# Altium PCB Receptor_AIS_R00.PcbDoc (part 2 of 2)
Units mm, origin at the board's own origin, x right, y up, seen from the top; angles counter-clockwise.
Board outline 80 x 80 mm, 4 copper layers (Top Layer, Layer 1, Layer 2, Bottom Layer), stack 1.587 mm thick; 130 components, 68 nets, 396 pads, 647 vias.
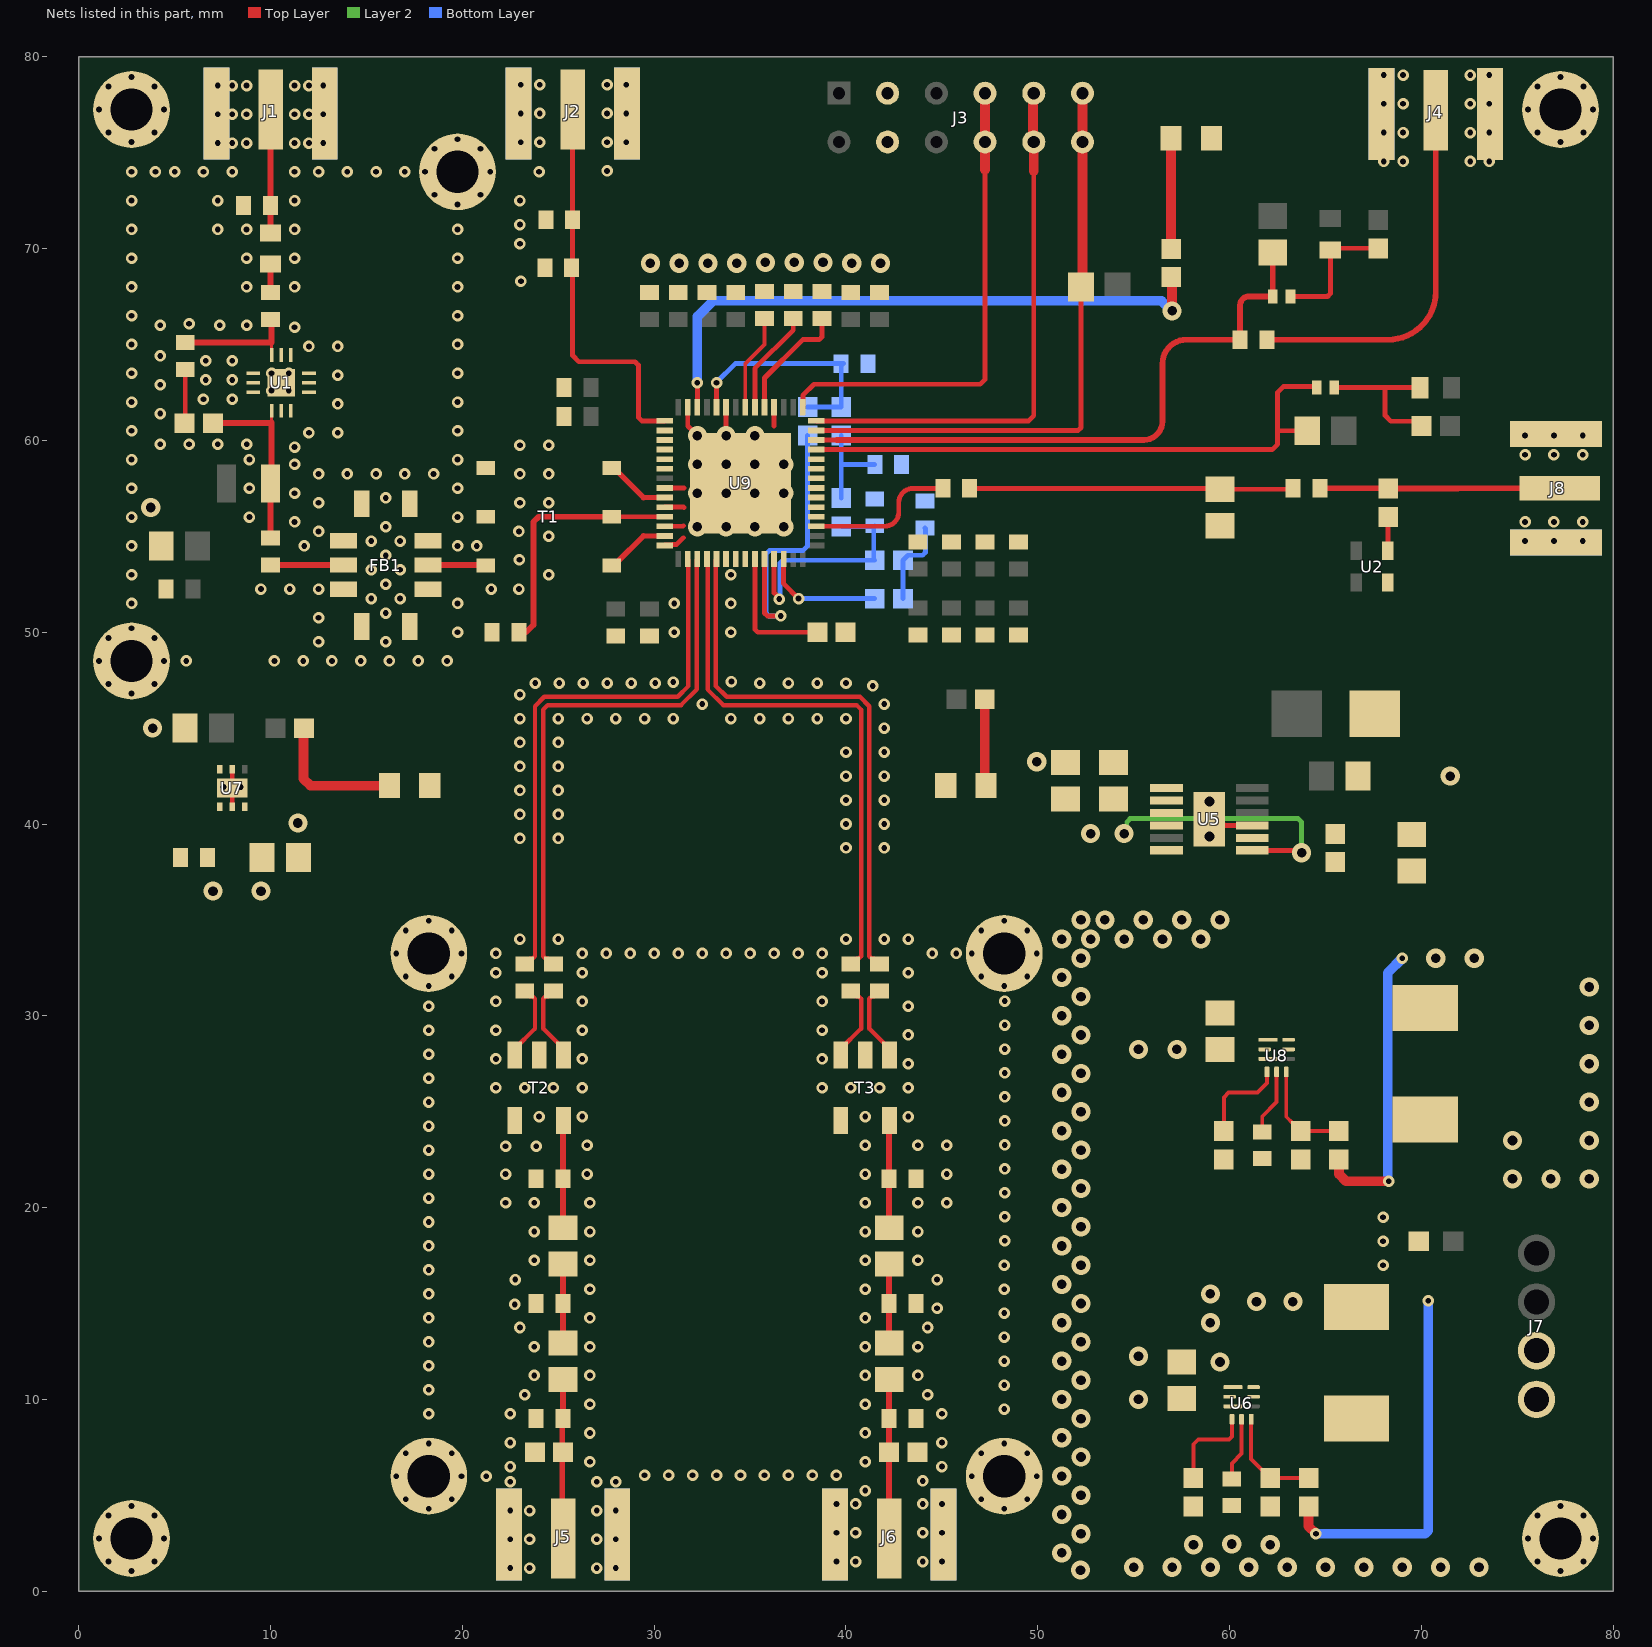
[diagram p4: the nets of this part, all layers, seen from the top]

## Via types
v1: diameter 0.6, hole 0.3, Top Layer to Bottom Layer, tented both sides, 472 vias
v2: diameter 1, hole 0.5, Top Layer to Bottom Layer, tented both sides, 127 vias
v3: diameter 0.6, hole 0.3, Top Layer to Bottom Layer, 48 vias

## Nets (pads, with @x,y where several pads share a name; then routed paths per layer and width w, separated by ;. In a path a pad name is that pad's centre, name@x,y a point inside that pad or via, vN(x,y) a via of type N, cw(c..) or ccw(c..) an arc to the next point about the centre after c; other vN are vias at no path point) (continued)
CS: J3.11 J3.12 R10.1 U9.27 | length 31.3
  Top Layer w0.254: U9.27@38.45,60.52 52.101,60.52 52.25,60.669 R10.1@52.25,68
  Top Layer w0.508: R10.1@52.25,68 52.33,68.08 52.33,75.17 J3.12@52.33,75.56 J3.11@52.33,78.1
GND: C1.1 C2.2 C6.1 C7.1 C8.2 C9.2 C10.2 C11.2 C14.2 C15.1 C16.2 C17.2 C19.2 C20.2 C22.1 C24.2 C25.2 C26.2 C27.2 C28.2 C29.2 C30.2 C31.2 C32.2 C33.2 C34.2 C35.2 C36.2 C37.2 C38.2 C39.2 C40.2 C44.2 C45.2 C46.1 C47.1 C48.1 C49.1 C50.1 C51.1 C52.1 C53.1 C54.1 C55.1 C56.1 C57.1 C58.1 C59.1 C60.1 D1.2 D2.2 D3.2 Designator13.1 Designator14.1 Designator15.1 Designator16.1 Designator17.1 Designator18.1 FB1.1 FB1.3 FB1.4 FB1.5 FB1.6 FB1.8 FB1.9 FB1.10 H1.1 H2.1 H3.1 H4.1 J1.2 J1.3 J2.2 J2.3 J3.3 J3.4 J4.2 J4.3 J5.2 J5.3 J6.2 J6.3 J7.1 J7.2 J8.2 J8.3 R6.2 R18.2 R19.1 R20.1 R22.1 R23.1 R24.1 R26.1 R27.1 T1.1 T1.2 T2.2 T2.5 T3.2 T3.5 U1.1 U1.2 U1.4 U1.5 U1.6 U1.8 U1.9 U1.10 U1.11 U1.12 U1.13 U2.2 U5.6 U5.9 U5.EPAD U6.4 U7.2 U7.3 U7.5 U7.7 U8.4 U9.6 U9.7 U9.8 U9.18 U9.19 U9.20 U9.21 U9.22 U9.23 U9.24 U9.32 U9.37 U9.41 U9.44 U9.45 U9.46 U9.47 U9.48 U9.50 U9.52 U9.54 U9.56 U9.57 | length 13.6
  Top Layer w0.254: U7.5@8,40.9 U7.2@8,42.85 ; U9.56@30.55,54.52 30.573,54.543 30.931,54.543 30.963,54.575 31.175,54.575 31.525,54.925 ; U9.54@30.55,55.52 31.495,55.52 31.525,55.55 ; U9.52@30.55,56.52 31.53,56.52 31.55,56.5 ; U9.50@30.55,57.52 31.545,57.52 31.55,57.525 ; U9.41@31.75,61.72 31.75,60.75 32.002,60.498 32.002,60.268 32.02,60.25 v2(32.25,60.25) ; v2(33.75,60.25) U9.37@33.75,61.72 ; 36.25,60.75 U9.32@36.25,61.72 ; v2(58.95,39.35) 58.945,39.355 U5.EPAD@58.945,40.25 59.237,39.958 59.738,39.958 59.771,39.925 U5.9@61.181,39.925
  other v1: 2.75,1.05 77.25,1.05 22.5,1.205 23.5,1.205 27,1.205 28,1.205 1.55,1.55 3.95,1.55 39.5,1.55 40.5,1.55 44,1.55 45,1.55 76.05,1.55 78.45,1.55 22.5,2.705 23.5,2.705 27,2.705 28,2.705 1.05,2.75 4.45,2.75 75.55,2.75 78.95,2.75 39.5,3.05 40.5,3.05 44,3.05 45,3.05 1.55,3.95 3.95,3.95 76.05,3.95 78.45,3.95 22.5,4.205 23.5,4.205 27,4.205 28,4.205 2.75,4.45 77.25,4.45 39.5,4.55 40.5,4.55 44,4.55 45,4.55 41,5.25 22.5,5.705 27,5.705 28,5.705 44,5.75 21.25,6 29.5,6.05 30.75,6.05 32,6.05 33.25,6.05 34.5,6.05 35.75,6.05 37,6.05 38.25,6.05 39.5,6.05 22.5,6.5 45,6.5 26.65,6.75 41,6.75 22.5,7.75 45,7.75 26.65,8.25 41,8.25 18.25,9.25 22.5,9.25 45,9.25 48.25,9.5 26.65,9.75 41,9.75 23.25,10.25 44.25,10.25 18.25,10.5 48.25,10.75 23.75,11.25 26.65,11.25 41,11.25 43.75,11.25 18.25,11.75 48.25,12 23.75,12.75 26.65,12.75 41,12.75 43.75,12.75 18.25,13 48.25,13.25 23,13.75 44.25,13.75 18.25,14.25 26.65,14.25 41,14.25 48.25,14.5 44.75,14.75 22.725,14.95 18.25,15.5 26.65,15.75 41,15.75 48.25,15.75 22.75,16.25 44.75,16.25 18.25,16.75 48.25,17 23.75,17.25 26.65,17.25 41,17.25 43.75,17.25 18.25,18 48.281,18.269 23.75,18.75 26.65,18.75 41,18.75 43.75,18.75 18.25,19.25 48.281,19.519 22.25,20.25 23.75,20.25 26.65,20.25 41,20.25 43.75,20.25 45.25,20.25 18.25,20.5 48.281,20.769 18.25,21.75 22.25,21.75 26.5,21.75 41,21.75 45.25,21.75 48.281,22.019 18.25,23 22.25,23.2 23.85,23.2 26.5,23.25 41,23.25 43.75,23.25 45.25,23.25 48.281,23.269 18.25,24.25 48.281,24.519 24,24.75 26.25,24.75 41,24.75 43.25,24.75 18.25,25.5 48.281,25.769 21.75,26.25 23.25,26.25 24.75,26.25 26.25,26.25 38.75,26.25 40.25,26.25 41.75,26.25 43.25,26.25 18.25,26.75 48.281,27.019 43.25,27.5 21.75,27.75 26.25,27.75 38.75,27.75 18.25,28 48.281,28.269 43.25,29 18.25,29.25 21.75,29.25 26.25,29.25 38.75,29.25 48.281,29.519 18.25,30.5 43.25,30.5 21.75,30.75 26.25,30.75 38.75,30.75 48.281,30.769 21.75,32.25 26.25,32.25 38.75,32.25 43.25,32.25 21.75,33.25 26.25,33.25 27.5,33.25 28.75,33.25 30,33.25 31.25,33.25 32.5,33.25 33.75,33.25 35,33.25 36.25,33.25 37.5,33.25 38.75,33.25 44.5,33.25 45.75,33.25 23,34 25,34 40,34 42,34 43.25,34 40,38.75 42,38.75 23,39.25 25,39.25 40,40 42,40 23,40.5 25,40.5 40,41.25 42,41.25 23,41.75 25,41.75 7.55,41.925 8.45,41.925 40,42.5 42,42.5 23,43 25,43 40,43.75 42,43.75 23,44.25 25,44.25 42,45 23,45.5 25,45.5 26.5,45.5 28,45.5 29.5,45.5 31,45.5 34,45.5 35.5,45.5 37,45.5 38.5,45.5 40,45.5 32.5,46.25 42,46.25 23,46.75 41.4,47.2 23.8,47.35 25.05,47.35 26.3,47.35 27.55,47.35 28.8,47.35 30.05,47.35 35.5,47.35 37,47.35 38.5,47.35 40,47.35 31,47.4 34.025,47.425 5.6,48.5 10.2,48.5 11.7,48.5 13.2,48.5 14.7,48.5 16.2,48.5 17.7,48.5 19.2,48.5 12.5,49.5 16,49.5 19.75,50 31.05,50 34,50 12.5,50.75 16,51 2.75,51.5 19.75,51.5 31.05,51.5 34,51.5 15.25,51.75 16.75,51.75 9.5,52.25 11,52.25 12.5,52.25 21.5,52.25 22.95,52.25 16,52.5 2.75,53 24.5,53 34,53 15.25,53.25 16.75,53.25 22.975,53.775 16,54 2.75,54.5 11.75,54.5 19.75,54.5 20.75,54.5 15.25,54.75 16.75,54.75 75.405,54.75 76.905,54.75 78.405,54.75 24.5,55 12.5,55.25 22.95,55.25 16,55.5 11.25,55.75 75.405,55.75 76.905,55.75 78.405,55.75 2.75,56 8.9,56 19.75,56 12.5,56.75 23,56.75 24.5,56.75 16,57 11.25,57.25 2.75,57.5 8.9,57.5 19.75,57.5 12.5,58.25 14,58.25 15.5,58.25 17,58.25 18.5,58.25 23,58.25 24.5,58.25 11.25,58.75 2.75,59 8.9,59 19.75,59 75.405,59.25 76.905,59.25 78.405,59.25 11.252,59.65 23,59.75 24.5,59.75 4.252,59.8 5.752,59.8 7.252,59.8 8.752,59.8 75.405,60.25 76.905,60.25 78.405,60.25 12.002,60.4 13.502,60.4 2.75,60.5 19.75,60.5 4.252,61.4 13.502,61.9 2.75,62 19.75,62 6.502,62.15 8.002,62.15 10.052,62.6 10.952,62.6 4.252,62.9 6.625,63.15 8.002,63.15 13.502,63.4 2.75,63.5 10.052,63.5 10.952,63.5 19.75,63.5 6.625,64.15 8.002,64.15 4.252,64.4 12.002,64.9 13.502,64.9 2.75,65 19.75,65 11.252,65.9 4.252,66 7.352,66 8.752,66 5.75,66.075 2.75,66.5 19.75,66.5 2.75,68 8.75,68 11.25,68 19.75,68 23.05,68.3 2.75,69.5 8.75,69.5 11.25,69.5 19.75,69.5 23,70.25 2.75,71 7.25,71 8.75,71 11.25,71 19.75,71 23,71.25 2.75,72.5 7.25,72.5 11.25,72.5 23,72.5 2.75,74 4,74 5,74 6.5,74 8,74 11.25,74 12.5,74 14,74 15.5,74 17,74 24,74 27.54,74.045 68.04,74.545 69.04,74.545 72.54,74.545 73.54,74.545 7.25,75.5 8,75.5 8.75,75.5 11.25,75.5 12,75.5 12.75,75.5 23.04,75.545 24.04,75.545 27.54,75.545 28.54,75.545 2.75,75.55 77.25,75.55 1.55,76.05 3.95,76.05 68.04,76.045 69.04,76.045 72.54,76.045 73.54,76.045 76.05,76.05 78.45,76.05 7.25,77 8,77 8.75,77 11.25,77 12,77 12.75,77 23.04,77.045 24.04,77.045 27.54,77.045 28.54,77.045 1.05,77.25 4.45,77.25 75.55,77.25 78.95,77.25 68.04,77.545 69.04,77.545 72.54,77.545 73.54,77.545 1.55,78.45 3.95,78.45 76.05,78.45 78.45,78.45 7.25,78.5 8,78.5 8.75,78.5 11.25,78.5 12,78.5 12.75,78.5 23.04,78.545 24.04,78.545 27.54,78.545 28.54,78.545 2.75,78.95 77.25,78.95 68.04,79.045 69.04,79.045 72.54,79.045 73.54,79.045
  other v2: 52.225,1.1 55,1.25 57,1.25 59,1.25 61,1.25 63,1.25 65,1.25 67,1.25 69,1.25 71,1.25 73,1.25 51.25,2 58.115,2.428 62.115,2.428 60.115,2.463 52.25,3 51.25,4 52.25,5 51.25,6 52.25,7 51.25,8 52.25,9 51.25,10 52.25,11 59.5,11.95 51.25,12 52.25,13 51.25,14 59,14 52.25,15 59,15.5 51.25,16 52.25,17 51.25,18 52.25,19 51.25,20 52.25,21 74.75,21.5 76.75,21.5 78.75,21.5 51.25,22 52.25,23 74.75,23.5 78.75,23.5 51.25,24 52.25,25 78.75,25.5 51.25,26 52.25,27 78.75,27.5 51.25,28 52.25,29 78.75,29.5 51.25,30 52.25,31 78.75,31.5 51.25,32 52.25,33 51.25,34 52.75,34 54.5,34 56.5,34 58.5,34 52.25,35 53.5,35 55.5,35 57.5,35 59.5,35 11.425,40.05 58.95,41.175 71.5,42.5 49.945,43.25 3.85,45 32.25,55.5 33.75,55.5 35.25,55.5 36.75,55.5 3.75,56.5 32.25,57.25 33.75,57.25 35.25,57.25 36.75,57.25 32.25,58.75 33.75,58.75 35.25,58.75 36.75,58.75 35.25,60.25 29.8,69.23 31.3,69.23 32.8,69.23 34.3,69.23 40.3,69.23 41.8,69.23 35.8,69.28 37.3,69.28 38.8,69.28
  other v3: 18.25,4.3 48.25,4.3 17.05,4.8 19.45,4.8 47.05,4.8 49.45,4.8 16.55,6 19.95,6 46.55,6 49.95,6 17.05,7.2 19.45,7.2 47.05,7.2 49.45,7.2 18.25,7.7 48.25,7.7 18.25,31.55 48.25,31.55 17.05,32.05 19.45,32.05 47.05,32.05 49.45,32.05 16.55,33.25 19.95,33.25 46.55,33.25 49.95,33.25 17.05,34.45 19.45,34.45 47.05,34.45 49.45,34.45 18.25,34.95 48.25,34.95 2.75,46.8 1.55,47.3 3.95,47.3 1.05,48.5 4.45,48.5 1.55,49.7 3.95,49.7 2.75,50.2 19.75,72.3 18.55,72.8 20.95,72.8 18.05,74 21.45,74 18.55,75.2 20.95,75.2 19.75,75.7
I_+: C18.2 T2.3 | length 4.1
  Top Layer w0.231: C18.2@24.75,31.3 24.476,31.026 24.351,31.026 24.216,30.89 24.216,30.563 24.216,29.393 24.216,29.336 25.27,28.282 T2.3@25.27,27.965
I_-: C13.2 T2.1 | length 4.1
  Top Layer w0.231: T2.1@22.73,27.965 22.73,28.282 23.784,29.336 23.784,29.572 23.784,30.385 23.784,30.89 23.649,31.026 23.524,31.026 C13.2@23.25,31.3
I_N: C13.1 U9.2 | length 28.8
  Top Layer w0.231: C13.1@23.25,32.7 23.524,32.974 23.649,32.974 23.784,33.11 23.784,46.144 24.271,46.631 31.221,46.631 31.784,47.194 31.784,53.786 U9.2@31.75,53.82
I_P: C18.1 U9.3 | length 28.8
  Top Layer w0.231: C18.1@24.75,32.7 24.476,32.974 24.351,32.974 24.216,33.11 24.216,45.966 24.45,46.2 31.4,46.2 32.216,47.016 32.216,53.786 U9.3@32.25,53.82
LDET: R2.2 U9.40 | length 31.9
  Top Layer w0.254: U9.40@32.25,61.72 v1(32.25,63)
  Top Layer w0.508: R2.2@56.95,68.515 57,68.515 v2(57,66.75)
  Bottom Layer w0.508: v1(32.25,63) 32.25,66.452 33.073,67.275 56.459,67.275 56.984,66.75 v2(57,66.75)
NetC3_1: C3.1 C4.2 U1.3 | length 6.3
  Top Layer w0.152: U1.3@10.052,64.548 10.052,65.1
  Top Layer w0.305: C3.1@5.552,65.1 10.052,65.1 10.052,66.248 C4.2@10,66.3
NetC3_2: C3.2 R1.2 | length 2.8
  Top Layer w0.254: R1.2@5.517,60.9 5.552,60.935 C3.2@5.552,63.7
NetC4_1: C4.1 L2.2 | length 1.5
  Top Layer w0.305: C4.1@10,67.7 L2.2@10,69.186
NetC5_1: C5.1 L1.1 R1.1 U1.7 | length 9.7
  Top Layer w0.152: 10.052,60.925 U1.7@10.052,61.552
  Top Layer w0.305: R1.1@6.987,60.9 10.052,60.9 ; C5.1@10,54.9 L1.1@10,57.75 10.05,57.8 10.05,60.922 10.052,60.924
NetC5_2: C5.2 FB1.7 | length 3.8
  Top Layer w0.305: C5.2@10,53.5 FB1.7@13.8,53.5
NetC6_2: C6.2 J1.1 L2.1 | length 6.4
  Top Layer w0.305: L2.1@10,70.814 C6.2@10,72.25 J1.1@10,77.25
NetC15_2: C15.2 L7.1 T2.4 | length 5.6
  Top Layer w0.305: L7.1@25.25,18.95 C15.2@25.25,21.5 T2.4@25.25,24.516
NetC22_2: C22.2 L7.2 L8.1 | length 4.1
  Top Layer w0.305: L8.1@25.25,12.95 L7.2@25.25,17.05
NetC26_1: C26.1 U9.35 | length 5
  Top Layer w0.203: U9.35@34.75,61.72 34.75,64 35.75,65 C26.1@35.75,66.35
NetC27_1: C27.1 U9.34 | length 5.5
  Top Layer w0.254: U9.34@35.25,61.72 35.25,63.75 37.25,65.75 C27.1@37.25,66.35
NetC28_1: C28.1 U9.33 | length 6.4
  Top Layer w0.254: U9.33@35.75,61.72 35.75,63.25 37.75,65.25 38.601,65.25 38.75,65.399 C28.1@38.75,66.35
NetC29_1: C29.1 R8.1 R9.1 U9.11 | length 12.7
  Top Layer w0.254: U9.11@36.25,53.82 36.25,52.047 36.525,51.772 v1(36.525,51.725)
  Bottom Layer w0.254: v1(36.525,51.725) 36.55,51.75 36.55,53.601 36.699,53.75 R9.1@41.49,53.75 ; R8.1@39.75,55.515 41.465,55.515 C29.1@41.5,55.55 41.448,55.498 41.448,53.802 R9.1@41.5,53.75
NetC31_1: C31.1 R7.1 R8.2 | length 5
  Bottom Layer w0.254: R8.2@39.75,56.985 39.75,58.56 39.75,58.75 ; R7.1@39.75,60.265 39.75,58.75 ; C31.1@41.5,58.75 39.75,58.75
NetC34_1: C34.1 R9.2 R32.1 | length 4.6
  Bottom Layer w0.254: R32.1@42.97,51.75 R9.2@42.97,53.75 43.232,54.012 43.993,54.012 44.142,54.161 44.142,55.406 C34.1@44.115,55.433
NetC41_1: C41.1 J8.1 R28.2 | length 12.5
  Top Layer w0.3: C41.1@64.7,57.5 68.106,57.5 68.121,57.485 R28.2@68.265,57.485 71.902,57.485 71.917,57.5 J8.1@77.205,57.5
NetC41_2: C41.2 C42.2 R18.1 | length 16.9
  Top Layer w0.254: C42.2@46.45,57.5 59.45,57.5 R18.1@59.5,57.45 62.959,57.45 63.009,57.5 C41.2@63.3,57.5
NetC43_1: C43.1 L5.1 R16.1 U9.26 | length 32.5
  Top Layer w0.254: U9.26@38.45,60.02 39.5,60.02
  Top Layer w0.305: 39.5,60.02 55.52,60.02 ccw(c55.52,61) 56.5,61 56.5,64 cw(c57.75,64) 57.75,65.25 C43.1@60.55,65.25 60.55,67.05 cw(c61,67.05) 61,67.5 L5.1@62.25,67.5 ; R16.1@62.25,69.8 L5.1@62.25,67.5 ; L5.1@62.3,67.5 L5.1@62.25,67.5
NetC43_2: C43.2 J4.1 | length 19.7
  Top Layer w0.305: C43.2@61.95,65.25 68.25,65.25 ccw(c68.25,67.75) 70.75,67.75 J4.1@70.75,77.205
NetC46_2: C46.2 J5.1 L8.2 R19.2 | length 8.4
  Top Layer w0.305: J5.1@25.25,2.75 25.21,2.79 25.21,7.21 R19.2@25.25,7.25 25.21,7.29 25.21,8.322 25.21,8.96 C46.2@25.25,9 L8.2@25.25,11.05
NetC47_2: C47.2 L9.1 T3.4 | length 5.6
  Top Layer w0.305: L9.1@42.25,18.95 42.25,24.516 T3.4@42.27,24.536
NetC48_2: C48.2 L9.2 L10.1 | length 4.1
  Top Layer w0.305: L10.1@42.25,12.95 C48.2@42.25,15 L9.2@42.25,17.05
NetC49_2: C49.2 J6.1 L10.2 R20.2 | length 8.3
  Top Layer w0.305: J6.1@42.25,2.75 R20.2@42.25,7.25 C49.2@42.25,9 L10.2@42.25,11.05
NetC51_2: C51.2 C56.2 F1.2 U6.5 U6.6 U8.5 U8.6
  other v1: 68,17 68,18.25 68,19.5
  other v2: 55.25,10 55.25,12.25 55.25,28.25 57.25,28.25
NetC53_2: C53.2 R22.2 U5.8
NetC54_2: C54.2 U6.8 | length 3.3
  Top Layer w0.203: C54.2@60.115,5.863 60.115,6.663 60.625,7.173 U6.8@60.625,8.965
NetC60_2: C60.2 U8.8 | length 3.4
  Top Layer w0.203: C60.2@61.7,23.95 61.7,24.75 62.45,25.5 U8.8@62.45,27.075
NetD1_1: D1.1 R29.1 | length 4.5
  Top Layer w0.5: R29.1@47.235,46.5 47.235,42.065 D1.1@47.3,42
NetD2_1: D2.1 R30.1 | length 7.3
  Top Layer w0.502: R30.1@11.735,45 11.72,44.985 11.72,42.355 12.075,42 D2.1@16.2,42
NetD3_1: D3.1 R2.1 | length 5.8
  Top Layer w0.508: R2.1@56.95,69.985 D3.1@56.95,75.75
NetFB1_2: FB1.2 T1.3 | length 3
  Top Layer w0.305: FB1.2@18.2,53.5 21.203,53.5 T1.3@21.223,53.48
NetL3_1: L3.1 L5.2 R15.1 | length 6.9
  Top Layer w0.254: L5.2@63.17,67.5 65.101,67.5 65.25,67.649 L3.1@65.25,69.936 L3.1@65.5,69.936 ; L3.1@65.5,70.015 R15.1@67.75,70.015
NetL4_1: L4.1 R14.1 U9.25 | length 30.6
  Top Layer w0.254: U9.25@38.45,59.52 62.22,59.52 62.5,59.8 62.5,60.5 ; R14.1@64.05,60.5 62.5,60.5 ; L4.1@64.54,62.75 64.49,62.8 62.8,62.8 62.5,62.5 62.5,60.5
NetL4_2: L4.2 L6.1 R17.1 | length 8.1
  Top Layer w0.254: L4.2@65.46,62.75 68.1,62.75 ; L6.1@69.936,62.75 68.1,62.75 ; R17.1@70.015,60.75 69.765,61 68.4,61 68.1,61.3 68.1,62.75
NetL11_1: L11.1 U6.2
NetL12_1: L12.1 U8.2
NetR6_1: R6.1 U9.9 | length 7
  Top Layer w0.254: U9.9@35.25,53.82 35.25,50.149 35.399,50 R6.1@38.515,50
NetR21_1: R21.1 R24.2 U6.9 | length 5.5
  Top Layer w0.203: U6.9@61.125,8.965 61.125,6.888 61.722,6.291 61.732,6.291 R24.2@62.115,5.908 ; R24.2@62.115,5.898 R21.1@64.115,5.898
NetR23_2: R23.2 U6.7 | length 4.8
  Top Layer w0.203: R23.2@58.115,5.898 58.115,7.663 58.365,7.913 59.976,7.913 60.125,8.061 U6.7@60.125,8.965
NetR25_1: R25.1 R27.2 U8.9 | length 5.4
  Top Layer w0.203: U8.9@62.95,27.075 62.95,24.735 63.307,24.378 63.317,24.378 R27.2@63.7,23.995 ; R27.2@63.7,23.985 R25.1@65.7,23.985
NetR26_2: R26.2 U8.7 | length 4.9
  Top Layer w0.203: R26.2@59.7,23.985 59.7,25.75 59.95,26 61.45,26 61.95,26.5 U8.7@61.95,27.075
NetR28_1: R28.1 U2.3 | length 1.8
  Top Layer w0.254: U2.3@68.265,54.25 R28.1@68.265,56.015
NetR31_2: R31.2 U9.10 | length 15.7
  Top Layer w0.254: U9.10@35.75,53.82 35.75,50.999 35.899,50.85 v1(36.6,50.85)
  Bottom Layer w0.254: v1(36.6,50.85) 35.983,50.85 35.834,50.999 35.834,54.084 36,54.25 37.75,54.25 38,54.5 R31.2@38,60.265
NetR32_2: R32.2 U9.12 | length 6.4
  Top Layer w0.254: U9.12@36.75,53.82 36.75,52.525 v1(37.525,51.75)
  Bottom Layer w0.254: v1(37.525,51.75) R32.2@41.5,51.75
Q_+: C21.2 T3.1 | length 4.1
  Top Layer w0.231: T3.1@39.73,27.965 39.73,28.282 40.784,29.336 40.784,29.572 40.784,30.385 40.784,30.89 40.649,31.026 40.524,31.026 C21.2@40.25,31.3
Q_-: C23.2 T3.3 | length 4.1
  Top Layer w0.231: C23.2@41.75,31.3 41.476,31.026 41.351,31.026 41.216,30.89 41.216,30.563 41.216,29.393 41.216,29.336 42.27,28.282 T3.3@42.27,27.965
Q_N: C23.1 U9.5 | length 28.8
  Top Layer w0.231: U9.5@33.25,53.82 33.216,53.786 33.216,47.194 33.779,46.631 40.729,46.631 41.216,46.144 41.216,33.11 41.351,32.974 41.476,32.974 C23.1@41.75,32.7
Q_P: C21.1 U9.4 | length 28.8
  Top Layer w0.231: U9.4@32.75,53.82 32.784,53.786 32.784,47.016 33.6,46.2 40.55,46.2 40.784,45.966 40.784,33.11 40.649,32.974 40.524,32.974 C21.1@40.25,32.7
REFIN: C42.1 U9.17 | length 7.9
  Top Layer w0.254: U9.17@38.45,55.52 42.02,55.52 ccw(c42.02,56.25) 42.75,56.25 42.75,56.75 cw(c43.5,56.75) 43.5,57.5 C42.1@45.05,57.5
RF+: T1.4 U9.55 | length 3.4
  Top Layer w0.254: 29.444,55.02 U9.55@30.55,55.02
  Top Layer w0.305: T1.4@27.777,53.48 27.904,53.48 28.064,53.641 29.444,55.02
RF-: T1.6 U9.51 | length 3.4
  Top Layer w0.254: 29.444,57.02 U9.51@30.55,57.02
  Top Layer w0.305: T1.6@27.777,58.56 27.904,58.56 28.064,58.399 29.444,57.02
RFCM: C7.2 T1.5 U9.53 | length 13.2
  Top Layer w0.254: T1.5@27.777,56.02 U9.53@30.55,56.02
  Top Layer w0.305: C7.2@22.95,50 23.321,50 23.7,50.379 23.7,55.74 23.98,56.02 T1.5@27.777,56.02
SD0: J3.9 J3.10 U9.28 | length 29.8
  Top Layer w0.254: U9.28@38.45,61.02 49.52,61.02 49.79,61.29 49.79,71 49.79,73.8 49.79,74.04 J3.10@49.79,75.56
  Top Layer w0.508: 49.79,74.04 49.79,75.52 49.75,75.56 49.75,78.06 J3.9@49.79,78.1
SDI/SDA: J3.7 J3.8 U9.29 | length 26.8
  Top Layer w0.254: U9.29@37.75,61.72 37.75,62.35 38.33,62.93 47,62.93 47.25,63.18 J3.8@47.25,75.56
  Top Layer w0.508: 47.25,74.112 J3.8@47.25,75.56 J3.7@47.25,78.1
VGAIN: C11.1 C14.1 J2.1 U9.43 | length 20.6
  Top Layer w0.254: J2.1@25.75,77.25 C14.1@25.75,71.5 25.75,69 25.75,64.425 26.075,64.1 29,64.1 29.175,63.925 29.175,61.2 29.355,61.02 U9.43@30.55,61.02
VIN_LDO_3.3V: C52.2 C57.2 L12.2 R25.2 U5.1 U5.2 U5.3 U5.4 U5.7 U8.3 | length 29.6
  Top Layer w0.254: U5.7@61.181,38.625 63.625,38.625 v2(63.75,38.5)
  Top Layer w0.508: R25.2@65.7,22.515 65.7,21.741 66.066,21.375 v1(68.3,21.375)
  Layer 2 w0.254: v2(54.5,39.5) 54.637,39.637 54.637,40.101 54.815,40.279 63.572,40.279 63.75,40.101 v2(63.75,38.5)
  Bottom Layer w0.508: v1(68.3,21.375) 68.3,21.4 68.25,21.45 68.25,32.25 v1(69,33)
  other v2: 70.75,33 72.75,33 52.75,39.5
VIN_LDO_5V: C50.2 C58.2 L11.2 R21.2 U6.3 U7.4 U7.6 | length 19.5
  Top Layer w0.508: R21.2@64.115,4.428 64.115,3.385 v1(64.5,3)
  Bottom Layer w0.508: v1(64.5,3) 70.201,3 70.35,3.149 v1(70.35,15.14)
  other v2: 61.4,15.1 63.3,15.1 7,36.5 9.5,36.5
VTUNE: C30.1 R7.2 R31.1 U9.38 | length 12.4
  Top Layer w0.254: U9.38@33.25,61.72 v1(33.25,63)
  Bottom Layer w0.254: v1(33.25,63) 33.25,63.023 34.227,64 C30.1@39.75,64 39.86,64 39.75,63.89 R7.2@39.75,61.735 R31.1@38,61.735
pads on no net: U5.5 U6.1 U8.1 U9.39

## Polygon pours and split planes (outlines as drawn)
+3.3V on Top Layer "+3.3V_L01_P093" (solid, remove dead copper, pour order 93): 59.25,70.55 61.35,70.55 69.25,70.55 69.25,73.925 59.25,73.925
+3.3V on Top Layer "+3.3V_L01_P090" (solid, remove dead copper, pour order 90): 27.25,64.25 29.25,64.25 29.25,61.452 34.75,61.452 34.75,67 27.25,67
NetC51_2 on Top Layer "12V_IN" (solid, remove dead copper, pour order 60): 54.5,11 54.5,13.25 56.5,13.25 56.5,11 58.3,11 58.3,10.55 60.75,10.55 60.75,9.5 59.75,9.5 59.75,8.25 54.5,8.25
+3.3V on Top Layer "12V_IN" (solid, remove dead copper, pour order 76): 64,41.1 65.6,41.1 65.6,50.5 59.9,50.5 59.9,41.8 59.901,41.788 59.901,40 64,40
NetC53_2 on Top Layer "LDO_5V_FB" (solid, remove dead copper, pour order 87): 60.75,39.75 64.25,39.75 64.25,40.9 71.25,40.9 71.25,38.85 62,38.85 60.75,38.85
+3.3V on Top Layer "3.3V_LDO_OUT" (solid, remove dead copper, pour order 64): 37,54.875 37,55.25 42.75,55.25 42.75,54 51.25,54 51.25,52.3 42.618,52.3
+5V on Top Layer "+5V_L01_P094" (solid, remove dead copper, pour order 94): 6.5,43.75 6.5,49.75 5.25,49.75 5.25,59 8.348,59 8.348,47.75 11,47.75 11,42.5 8.55,42.5 8.55,43.75
+3.3V on Top Layer "3.3V_LDO_OUT" (solid, remove dead copper, pour order 69): 36.75,54.719 36.75,52 38,52 41.3,52 41.3,50.25 51.25,50.25 51.25,52.2 42.245,52.2
+3.3V on Top Layer "3.3V_LDO_OUT" (solid, remove dead copper, pour order 72): 67.5,55.5 63.25,55.5 63.25,51.5 67.5,51.5
VIN_LDO_5V on Top Layer "5V_IN_LDO" (solid, remove dead copper, pour order 74): 6.25,40.75 6.25,41.126 6.25,35 10.5,35 10.5,41.25 6.25,41.25
NetL12_1 on Top Layer "SW_Node_DCDC" (solid, remove dead copper, pour order 75): 72.45,22.5 67.2,22.5 67.2,25.5 67.209,25.5 67.209,25.75 64.765,25.75 64.765,27.55 63.075,28.113 63.075,28.6 72.45,28.6
NetC51_2 on Top Layer "12V_IN" (solid, remove dead copper, pour order 78): 62.575,28.61 60.575,28.61 60.575,29.25 54.5,29.25 54.5,26.86 61.575,26.86 61.575,27.61 62.575,27.61
VIN_LDO_5V on Top Layer "SW_Node_DCDC" (solid, remove dead copper, pour order 81): 71,16.3 60.75,16.3 60.75,11.75 60.75,10.5 71,10.5
NetL11_1 on Top Layer "SW_Node_DCDC" (solid, remove dead copper, pour order 79): 63.18,9.463 61.49,10.026 61.49,10.363 69.48,10.363 69.48,7.563 63.18,7.563
NetC51_2 on Top Layer "12V_IN" (solid, remove dead copper, pour order 80): 71,20 67.25,20 67.25,16.5 71,16.5
VIN_LDO_3.3V on Top Layer "VIN_LDO" (solid, remove dead copper, pour order 82): 49.5,42.25 58,42.25 58,39.75 56.25,39.75 56.25,38.5 49.5,38.5
VIN_LDO_3.3V on Top Layer "VIN_LDO_5V" (solid, remove dead copper, pour order 83): 67.5,30.3 67.5,33.75 73.75,33.75 73.75,28.6 62.7,28.6 62.7,30.3
12V on Top Layer "12V_IN" (solid, remove dead copper, pour order 86): 78.25,13.79 78.25,20.29 71,20.29 71,13.79
+3.3V on Top Layer "+3.3V_L01_P088" (solid, remove dead copper, pour order 88): 73.304,58.6 73.304,63.75 68.7,63.75 68.7,61.7 65,61.7 65,58.6
GND on Top Layer "GND_TL" (solid, remove dead copper, pour order 96): 0,0 0,80 80,80 80,0
GND on Layer 2 "3.3V_LDO_OUT" (solid, pour order 84): 28.75,70.25 28.75,67 42.75,67 42.75,70.25
GND on Layer 2 "3.3V_LDO_OUT" (solid, pour order 89): 31,61.25 31,54.25 38,54.25 38,61.25
+3.3V on Layer 2 "12V_IN" (solid, remove dead copper, pour order 92): 26.25,73 30.25,73 30.25,79.5 66.75,79.5 66.75,73.5 72,73.5 72,44 43.25,44 43.25,49 26.25,49
VIN_LDO_5V on Layer 2 "+5V_LDO" (solid, remove dead copper, pour order 97): 60.75,14 64.75,14 64.75,37.75 6.25,37.75 6.25,35.775 60.75,35.775
GND on Layer 2 "GND_RF" (solid, remove dead copper, pour order 98): 0,0 80,0 80,80 0,80
NetC51_2 on Bottom Layer "12V_IN" (solid, remove dead copper, pour order 61): 71,20 71,16.5 58,16.5 58,8.75 54.5,8.75 54.5,29.25 58,29.25 58,20
VIN_LDO_3.3V on Bottom Layer "VIN_LDO_5V" (solid, remove dead copper, pour order 67): 67.5,32.25 67.5,35.75 50.75,35.75 50.75,40.25 57,40.25 57,39.75 57,37.75 73.75,37.75 73.75,32.25
GND on Bottom Layer "GND_DC-DC" (solid, remove dead copper, pour order 71): 0,0 80,0 80,80 0,80
GND on Layer 1 "GND_DC-DC" (solid, remove dead copper, pour order 68): 0,0 80,0 80,80 0,80

## Keep-outs
Keep-Out Layer:
  lines w0.127: 0.25,0.25 79.75,0.25 79.75,79.75 0.25,79.75 0.25,0.25

## Other copper
Top Layer:
  pour cut-out: 70.383,63.652 70.383,61.418 70.968,61.418 70.968,63.652
  pour cut-out: 66.904,55.651 66.904,51.333 67.945,51.333 67.945,55.651
  pour cut-out: 52.5,40.7 52.5,43.8 52.9,43.8 52.9,40.7
  pour cut-out: 69,10.218 69,13.621 64.25,13.621 64.25,10.218
  pour cut-out: 45.595,58.14 45.595,56.86 45.9,56.86 45.9,58.14
  pour cut-out: 64.666,61.402 64.666,59.598 65.25,59.598 65.25,61.402
  pour cut-out: 61.096,65.891 61.096,64.595 61.401,64.595 61.401,65.891
Multi-Layer:
  pour cut-out: 73.75,32 73.75,33.5 79.75,33.5 79.75,32
  pour cut-out: 60.75,33.5 60.75,32 54.25,32 54.25,0.5 52.75,0.5 52.75,33.5

## Silkscreen, mask and mechanical layers (free items; w line width, h text height)
Top Overlay:
  circle w0.2: c58,75.75 r2.5
  circle w0.2: c46.25,42 r2.5
  circle w0.2: c17.25,42 r2.5
  lines w0.2: 69.5,55.25 69.5,58.35
  text "LO" at 64,77.75 h1.5
  text "RF_IN" at 14.376,77.625 h1.5
  text "VGAIN" at 29.876,77.5 h1.5
  text "MON" at 62.751,75.5 h1.5
  text "LOCK" at 55.251,71.25 h1.5
  text "REF" at 75.001,52 h1.5
  text "IN" at 75.875,48.5 h1.5
  text "+3.3V" at 42.876,37.5 h1.5
  text "+5V" at 15.001,37 h1.5
  text "I_OUT" at 14.376,1.375 h1.5
  text "Q_OUT" at 30.501,1.375 h1.5
Bottom Overlay:
  lines w0.2: 44.5,50.75 46.75,50.75
Top Solder:
  rectangle: 8.75,48 20.25,49
  region: 48.75,33.75 47.75,33.75 47.75,5.5 48.75,5.5
  region: 48.75,6.5 45.25,6.5 45.25,5.5 48.75,5.5
  region: 48.75,33.75 43.75,33.75 43.75,32.75 48.75,32.75
  region: 39,6.5 28.75,6.5 28.75,5.5 39,5.5
  rectangle: 25.75,32.75 39.25,33.75
  rectangle: 18.25,32.75 22.25,33.75
  rectangle: 17.75,5.5 18.75,33.25
  rectangle: 17.75,5.5 21.75,6.5
  rectangle: 2.25,73.5 8.5,74.5
  rectangle: 2.75,48 6,49
  rectangle: 19.25,54 20.25,74.5
  region: 20.25,74.5 12,74.5 12,73.5 20.25,73.5
  rectangle: 2.25,48 3.25,74.5
  rectangle: 19.25,48 20.25,53
Mechanical 1:
  the board outline again, w0.2